# Altium PCB Elevator_Controller.PcbDoc
Units mil, origin at the board's own origin, x right, y up, seen from the top; angles counter-clockwise.
Board outline 6000 x 4000 mil, 2 copper layers (Top Layer, Bottom Layer); 37 components, 34 nets, 198 pads, 47 vias.
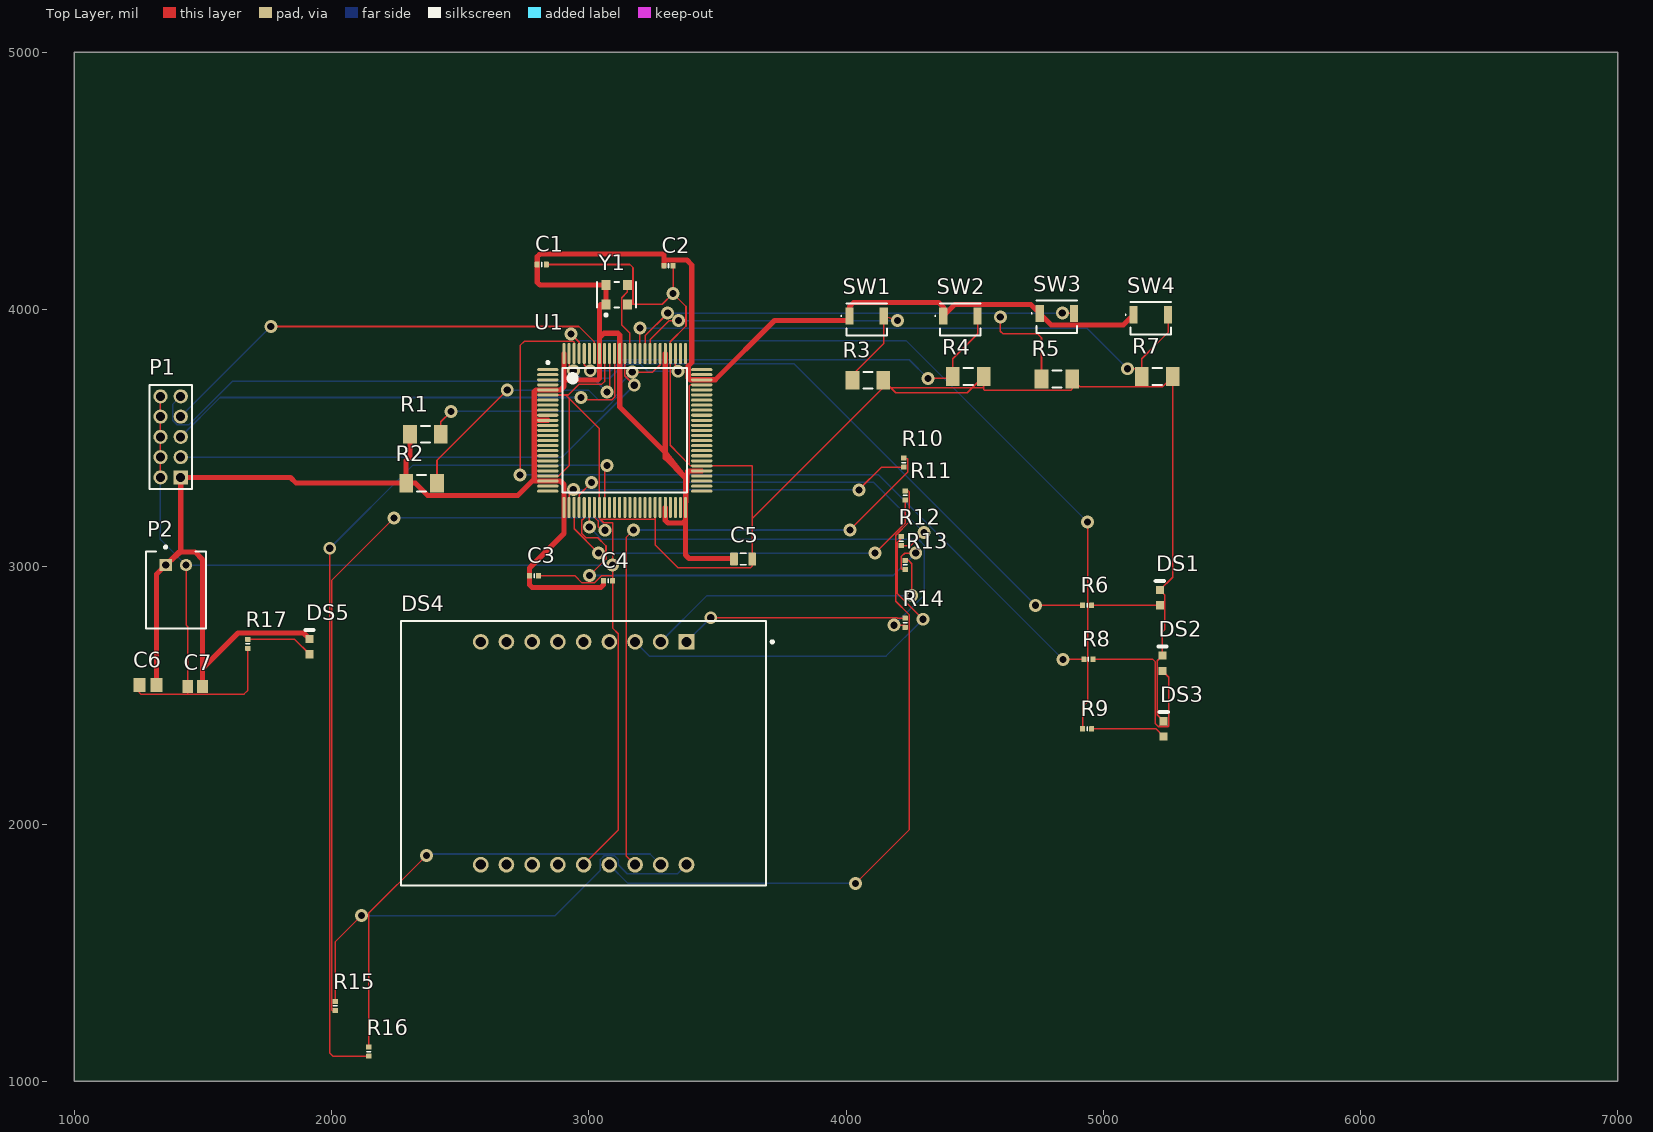
[diagram p0: Top Layer view]
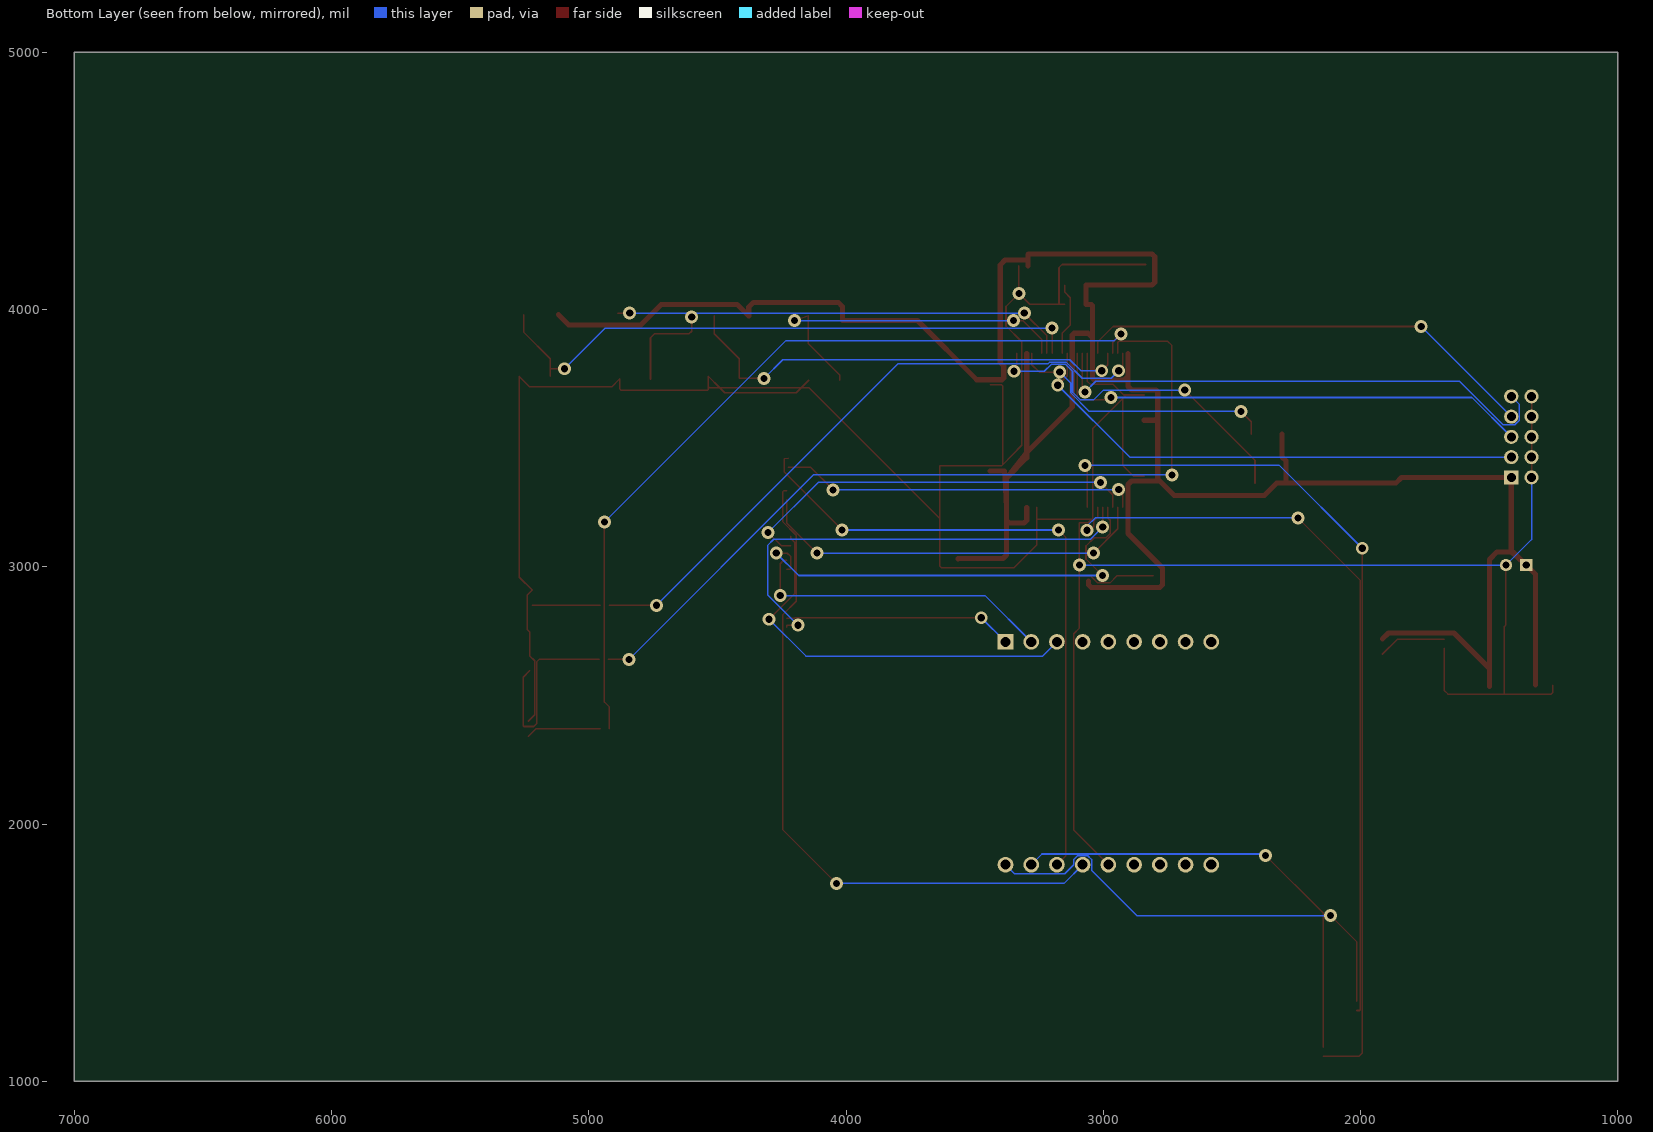
[diagram p1: Bottom Layer view, seen from below]
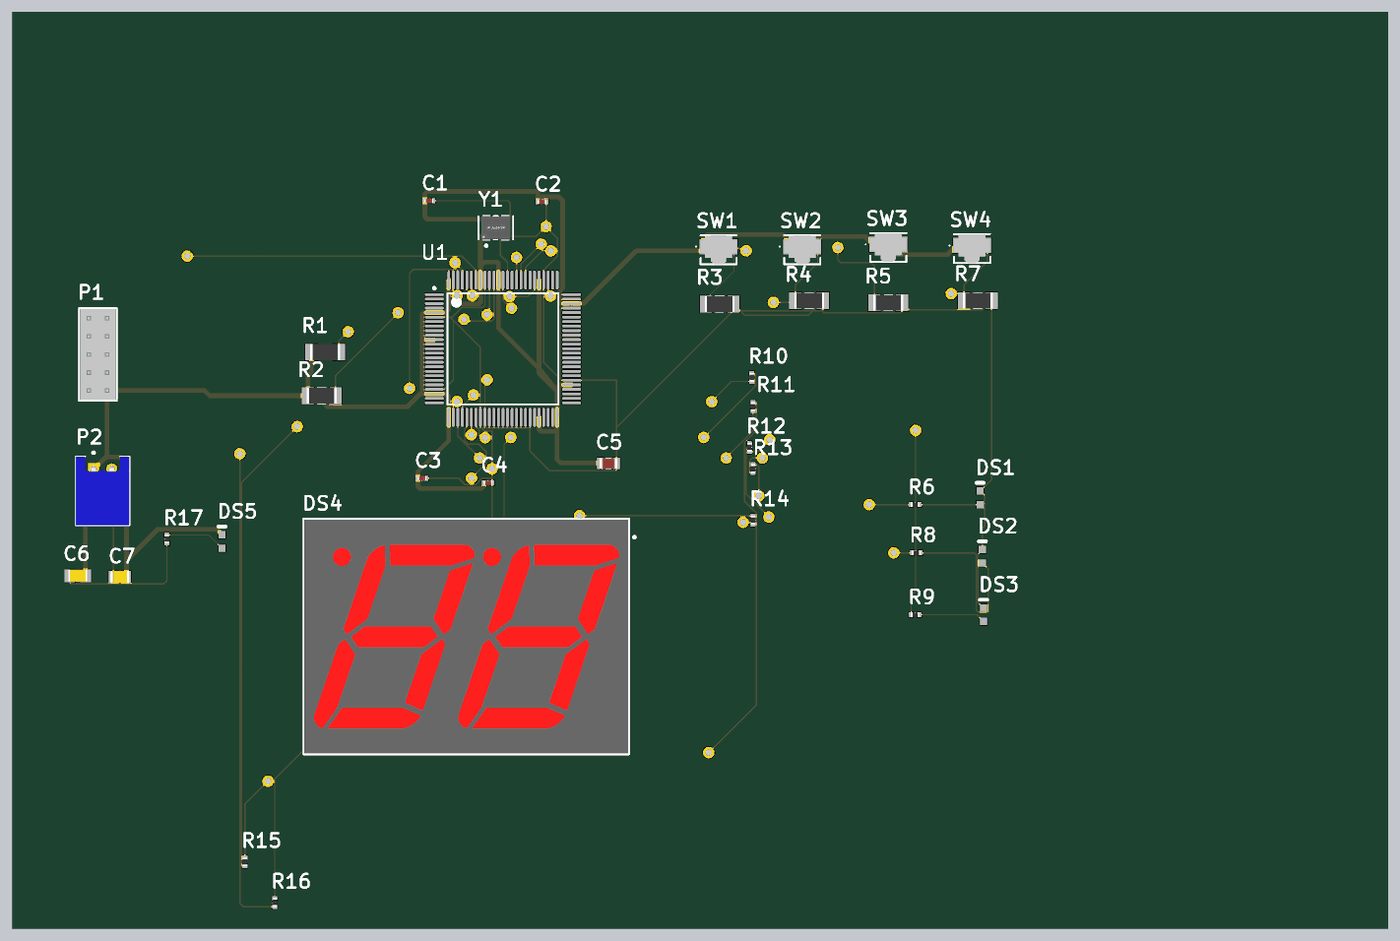
[diagram p2: 3D render of the assembled board from above, using the file's embedded part models]

## Layer stack, top to bottom
Top Solder: solder mask 0.4, Solder Resist, Dk 3.5
Top Layer: signal copper 1.4
Dielectric 1: dielectric 12.6, FR-4, Dk 4.8
Bottom Layer: signal copper 1.4
Bottom Solder: solder mask 0.4, Solder Resist, Dk 3.5

## Board outline
1000,1000 7000,1000 7000,5000 1000,5000

## Design rules (kind name [scope] priority, off if disabled: settings)
Clearance [All] p1: gap=1 ignorepadtopadclearanceinfootprint=FALSE
MinimumSolderMaskSliver [All] p1: minsoldermaskwidth=0.2
PolygonConnect [All] p1: connectstyle=Relief reliefconductorwidth=10 reliefentries=4 polygonreliefangle="90 Angle" airgapwidth=10
RoutingVias [All] p1: holewidth=28 width=50 viastyle="Through Hole" minholewidth=28 minwidth=50 maxholewidth=28 maxwidth=50
SilkToSilkClearance [All] p1: silktosilkclearance=3
SilkToSolderMaskClearance [IsPad] p1: minsilkscreentomaskgap=0.5 clearancetoexposedcopper=TRUE
SolderMaskExpansion [All] p1: expansion=4 istentingtop=FALSE
SupplyNets "Schematic Supply Nets_1" [InNet('+3v3')] p1: voltage=0.000
SupplyNets "Schematic Supply Nets" [InNet('GND')] p2: voltage=0.000
Width Power_Width [InNet('+3v3')] p1: maxlimit=25 minlimit=15 preferedwidth=20
Width [All] p2: maxlimit=8 minlimit=4 preferedwidth=6 minimp=50.000000 maximp=50.000000 favimp=50.000000
27 further rules are at their usual default settings.

## Classes and differential pairs
component class 04_Peripherals: DS1 DS2 DS3 DS4 R3 R4 R5 R6 R7 R8 R9 R10 R11 R12 R13 R14 R15 R16 SW1 SW2 SW3 SW4
component class 03_Config_Clock_JTAG: P1 R1 R2 Y1
component class 02_Power: C6 C7 DS5 P2 R17
component class 01_FPGA: C1 C2 C3 C4 C5 U1

## Components (designator, comment, footprint, x,y, rotation, side; value= is the part's Value field where it differs from the comment)
C1 "Capacitor 100nF +/-20% 50V 0402" CAPC0402(1005)60_L 2817.28,4175 r0 top value=100nF
C2 "Capacitor 100nF +/-20% 50V 0402" CAPC0402(1005)60_L 3310,4170 r0 top value=100nF
C3 "Capacitor 100nF +/-20% 50V 0402" CAPC0402(1005)60_L 2787.28,2965 r0 top value=100nF
C4 "Capacitor 100nF +/-20% 50V 0402" CAPC0402(1005)60_L 3075,2945 r0 top value=100nF
C5 "Capacitor 10µF +/-20% 25V 0805" CAPC0805(2012)145_L 3600,3030 r0 top value=10µF
C6 "Capacitor 10 uF +/- 10% 16 V 0805" CAPC2013X135X45NL10T25 1286.54,2540 r0 top value=10µF
C7 "Capacitor 100 nF +/-10% 50 V 0805" CAPC2013X95X50LL10T25 1470,2535 r0 top value=100nF
DS1 "HSMH-C190" AVAG-HSMX-C190_V 5220,2880 r90 top
DS2 "HSMH-C190" AVAG-HSMX-C190_V 5230,2625 r90 top
DS3 "HSMH-C190" AVAG-HSMX-C190_V 5235,2370 r90 top
DS4 "DC08-11SRWA" FP-DC08-11SRWA-MFG 2980,2275 r180 top
DS5 "HSMH-C190" AVAG-HSMX-C190_V 1915,2689.52 r90 top
P1 "TW-05-03-F-D-378-078" SMTC-TW-05-03-X-D-378-078 1413.74,3347.52 r90 top
P2 "S2B-PH-K-S(LF)(SN)" JST-S2B-PH-K-S_V 1395,2910 r0 top
R1 "Resistor 10k +/-1% 1206 250 mW" RESC3216X60X45ML15T20 2365,3515 r0 top value=10k
R2 "Resistor 10k +/-1% 1206 250 mW" RESC3216X60X45ML15T20 2350,3325 r0 top value=10k
R3 "Resistor 10k +/-1% 1206 250 mW" RESC3216X60X45ML15T20 4085,3725 r0 top value=10k
R4 "Resistor 10k +/-1% 1206 250 mW" RESC3216X60X45ML15T20 4475,3740 r0 top value=10k
R5 "Resistor 10k +/-1% 1206 250 mW" RESC3216X60X45ML15T20 4820,3730 r0 top value=10k
R6 "Resistor 330R +/-5 % 0402 63 mW" RESC0402(1005)_L 4937.28,2850 r0 top value=330
R7 "Resistor 10k +/-1% 1206 250 mW" RESC3216X60X45ML15T20 5210,3740 r0 top value=10k
R8 "Resistor 330R +/-5 % 0402 63 mW" RESC0402(1005)_L 4942.28,2640 r0 top value=330
R9 "Resistor 330R +/-5 % 0402 63 mW" RESC0402(1005)_L 4937.28,2370 r0 top value=330
R10 "330R2J" RESC0402(1005)_L 4225,3405 r90 top value=330
R11 "330R2J" RESC0402(1005)_L 4230,3277.28 r90 top value=330
R12 "330R2J" RESC0402(1005)_L 4215,3100 r90 top value=330
R13 "330R2J" RESC0402(1005)_L 4230,3007.28 r90 top value=330
R14 "330R2J" RESC0402(1005)_L 4230,2782.28 r90 top value=330
R15 "330R2J" RESC0402(1005)_L 2015,1292.72 r90 top value=330
R16 "330R2J" RESC0402(1005)_L 2145,1115 r90 top value=330
R17 "1KR2J" RESC0402(1005)_L 1675,2700 r90 top value=1k
SW1 "B3U-3000P" OMRON-B3U-3000P_V 4080,3975 r0 top
SW2 "B3U-3000P" OMRON-B3U-3000P_V 4445,3975 r0 top
SW3 "B3U-3000P" OMRON-B3U-3000P_V 4820,3985 r0 top
SW4 "B3U-3000P" OMRON-B3U-3000P_V 5185,3980 r0 top
U1 "LCMXO2-640HC-4TG100C" TQFP100_M 3140,3530 r0 top
Y1 "ASEM1-100.000MHZ-LC-T" FP-ASEM-MFG 3108.66,4057.6 r0 top

## Footprints (in the part's own frame and the unit in brackets; to place one, negate y for a bottom-side part, rotate by r counter-clockwise, add the part's x,y. Pads: shape width x height; smd on the part's side, far side on the other; paste and mask are expansions set on the pad)
AVAG-HSMX-C190_V [mm] "SMD, 2-Leads, Body 1.6x0.8mm, Height 0.9mm"
  rect 0.8x0.8 smd: 1(-0.75,0) 2(0.75,0)
  silkscreen extent 1.65,-0.4 1.65,0.4, body extent -0.8,-0.4 0.8,0.4, height 0.9
CAPC0402(1005)60_L [mm] "Chip Capacitor, Body 1.0x0.5mm, Height 0.6mm, IPC High Density"
  rrect25% 0.5x0.55 smd: 1(-0.45,0) 2(0.45,0)
  silkscreen extent 0,-0.2 0,0.2, body extent -0.5,-0.25 0.5,0.25, height 0.6
CAPC0805(2012)145_L [mm] "Chip Capacitor, Body 2.0x1.2mm, Height 1.45mm, IPC High Density"
  rrect25% 0.76x1.3 smd: 1(-0.9,0) 2(0.89,0)
  silkscreen extent -0.3,-0.55 0.3,0.55, body extent -1,-0.6 1,0.6, height 1.45
CAPC2013X95X50LL10T25 [mm] "Chip Capacitor, 2-Leads, Body 2.10x1.35mm, IPC High Density"
  rect 1.05x1.3 smd: 1(-0.725,0) 2(0.725,0)
  body extent -1.05,-0.67 1.05,0.67, height 0.95
CAPC2013X135X45NL10T25 [mm] "Chip Capacitor, 2-Leads, Body 2.10x1.35mm, IPC Medium Density"
  rect 1.2x1.4 smd: 1(-0.85,0) 2(0.85,0)
  body extent -1.05,-0.67 1.05,0.67, height 1.35
FP-ASEM-MFG [mm]
  rect 0.9x1 smd paste+0 mask+0: 1(-1.05,-0.95) 2(1.05,-0.95) 3(1.05,0.95) 4(-1.05,0.95)
  silkscreen extent -1.92,-2.12 1.92,1.28, body extent -1.73,-1.55 1.73,1.55, height 0.25
FP-DC08-11SRWA-MFG [mm]
  rect 1.55x1.55 hole 1 paste-2539.97 mask+0: 1(-10.16,-11)
  round 1.55 hole 1 paste-2539.97 mask+0: 2(-7.62,-11) 3(-5.08,-11) 4(-2.54,-11) 5(0,-11) 6(2.54,-11) 7(5.08,-11) 8(7.62,-11) 9(10.16,-11) 10(10.16,11) 11(7.62,11) 12(5.08,11) 13(2.54,11) 14(0,11) 15(-2.54,11) 16(-5.08,11) 17(-7.62,11) 18(-10.16,11)
  silkscreen extent -18.75,-13.05 18.03,13.05, body extent -18.13,-13.15 18.13,13.15, height 0.25
JST-S2B-PH-K-S_V [mm] "THD, 2-Leads, Body 7.6x5.9mm, Pitch 2mm"
  rect 1.2x1.2 hole 0.7: 1(-1,2.45)
  round 1.2 hole 0.7: 2(1,2.45)
  silkscreen extent -2.95,-3.8 2.95,4.35, body extent -2.95,-3.8 2.95,3.8, height 4.8
OMRON-B3U-3000P_V [mm] "SMD, 2-Leads, Body 4x3.2mm"
  rect 0.8x1.7 smd: 1(-1.7,0) 2(1.7,0)
  silkscreen extent -2.55,-1.95 2,1.25, body extent -2,-1.95 2,1.25, height 1.2
RESC0402(1005)_L [mm] "Chip Resistor, Body 1.0x0.5mm, IPC High Density"
  rrect25% 0.5x0.55 smd: 1(-0.45,0) 2(0.45,0)
  silkscreen extent 0,-0.2 0,0.2, body extent -0.5,-0.25 0.5,0.25, height 0.3
RESC3216X60X45ML15T20 [mm] "Chip Resistor, 2-Leads, Body 3.3x1.75mm, IPC Low Density"
  rect 1.35x1.85 smd: 1(-1.525,0) 2(1.525,0)
  silkscreen extent -0.45,-0.82 0.45,0.82, body extent -1.65,-0.87 1.65,0.87, height 0.6
SMTC-TW-05-03-X-D-378-078 [mm] "Terminal Strip, 2x5 Pins, Vertical, 2mm Pitch, Male"
  rect 1.4x1.4 hole 0.89: 1(0,0)
  round 1.4 hole 0.89: 2(0,2) 3(2,0) 4(2,2) 5(4,0) 6(4,2) 7(6,0) 8(6,2) 9(8,0) 10(8,2)
  silkscreen extent -1.13,-1.1 9.13,3.1, body extent -1,-0.97 9,2.97, height 11.6
TQFP100_M [mm] "Thin QFP, 100-Leads, Body 14x14mm, Pitch 0.5mm, IPC Low Density"
  oval 2.1x0.3 smd: 1(-7.6,6) 2(-7.6,5.5) 3(-7.6,5) 4(-7.6,4.5) 5(-7.6,4) 6(-7.6,3.5) 7(-7.6,3) 8(-7.6,2.5) 9(-7.6,2) 10(-7.6,1.5) 11(-7.6,1) 12(-7.6,0.5) 13(-7.6,0) 14(-7.6,-0.5) 15(-7.6,-1) 16(-7.6,-1.5) 17(-7.6,-2) 18(-7.6,-2.5) 19(-7.6,-3) 20(-7.6,-3.5) 21(-7.6,-4) 22(-7.6,-4.5) 23(-7.6,-5) 24(-7.6,-5.5) 25(-7.6,-6) 51(7.6,-6) 52(7.6,-5.5) 53(7.6,-5) 54(7.6,-4.5) 55(7.6,-4) 56(7.6,-3.5) 57(7.6,-3) 58(7.6,-2.5) 59(7.6,-2) 60(7.6,-1.5) 61(7.6,-1) 62(7.6,-0.5) 63(7.6,0) 64(7.6,0.5) 65(7.6,1) 66(7.6,1.5) 67(7.6,2) 68(7.6,2.5) 69(7.6,3) 70(7.6,3.5) 71(7.6,4) 72(7.6,4.5) 73(7.6,5) 74(7.6,5.5) 75(7.6,6)
  oval 0.3x2.1 smd: 26(-6,-7.6) 27(-5.5,-7.6) 28(-5,-7.6) 29(-4.5,-7.6) 30(-4,-7.6) 31(-3.5,-7.6) 32(-3,-7.6) 33(-2.5,-7.6) 34(-2,-7.6) 35(-1.5,-7.6) 36(-1,-7.6) 37(-0.5,-7.6) 38(0,-7.6) 39(0.5,-7.6) 40(1,-7.6) 41(1.5,-7.6) 42(2,-7.6) 43(2.5,-7.6) 44(3,-7.6) 45(3.5,-7.6) 46(4,-7.6) 47(4.5,-7.6) 48(5,-7.6) 49(5.5,-7.6) 50(6,-7.6) 76(6,7.6) 77(5.5,7.6) 78(5,7.6) 79(4.5,7.6) 80(4,7.6) 81(3.5,7.6) 82(3,7.6) 83(2.5,7.6) 84(2,7.6) 85(1.5,7.6) 86(1,7.6) 87(0.5,7.6) 88(0,7.6) 89(-0.5,7.6) 90(-1,7.6) 91(-1.5,7.6) 92(-2,7.6) 93(-2.5,7.6) 94(-3,7.6) 95(-3.5,7.6) 96(-4,7.6) 97(-4.5,7.6) 98(-5,7.6) 99(-5.5,7.6) 100(-6,7.6)
  silkscreen extent -7.72,-6.15 6.15,6.82, body extent -7,-7 7,7, height 1.6

## Part data
C1 C2 C3 C4: library part CMP-001-00067-3, "Chip Capacitor, 100nF +/-20%, 50V, 0402, Thickness 0.6 mm", Case/Package=0402, Max Operating Temperature=85°C, Min Operating Temperature=-55°C, Tolerance=10%, Voltage Rating=50V, Mounting Technology=SMT, Pins=2
C5: library part CMP-001-00079-4, "Chip Capacitor, 10µF +/-20%, 25V, 0805, Thickness 1.45 mm", Case/Package=0805, Max Operating Temperature=85°C, Min Operating Temperature=-55°C, Tolerance=10%, Voltage Rating=25V, Mounting Technology=SMT, Pins=2
C6: library part CMP-001-00015-6, "Chip Capacitor, 10 uF, +/- 10%, 16 V, 0805 (2012 Metric)", Capacitor Type=Ceramic, Case/Package=0805, Max Operating Temperature=85°C, Min Operating Temperature=-55°C, Tolerance=10%, Voltage Rating=16V, Mounting Technology=SM, Pins=2, RoHS Compliant=True
C7: library part CMP-001-00018-6, "Chip Capacitor, 100 nF, +/- 10%, 50 V, 0805 (2012 Metric)", Capacitor Type=Ceramic, Case/Package=0805, Max Operating Temperature=125°C, Min Operating Temperature=-55°C, Tolerance=10%, Voltage Rating=50V, Mounting Technology=SM, Pins=2, RoHS Compliant=True
DS1 DS2 DS3 DS5: library part CMP-007-00014-2, "LED Uni-Color Red, 65 mW, 20 mA, -40 to 85 degC, 2-Pin SMD, RoHS, Tape and Reel", Case/Package=0603, Colour=Red, Forward Current=20mA, Forward Voltage=1.8V, Manufacturer=Avago, Max Operating Temperature=85°C, Min Operating Temperature=-40°C, Package Description="2-Pin Surface Mount Device, Body 1.6 x 0.8 mm, Height 0.9 mm", Package Quantity=4000, Package Reference=HSMX-C190, Power=78mW, Datasheet URL=http://docs.avagotech.com/docs/AV02-0551EN, Datasheet Version=Mar-12, Illumination Colour=Red, Lens Style=Diffused, Luminous Intensity=17mcd, Manufacturer URL=http://www.avagotech.com/, Mounting Technology=SM, Nominal Vf=1.8V, Packaging=TapeandReel, Pins=2, RoHS Compliant=True, Viewing Angle=170degrees
DS4: library part CMP-44525-000001-1, "DISPLAY 660NM RED 2DIG 0.8\" 7SEG", Forward Current=20mA, Forward Voltage=1.85V, Manufacturer=Kingbright, Power Dissipation=75mW, Reverse Voltage=5V, Temperature="-40°C to +85°C", Temperature Range High=+85°C, Temperature Range Low=-40°C, Automotive=No, Category=Disp, ComponentLink2Description=Datasheet, ComponentLink2URL=https://www.kingbrightusa.com/images/catalog/SPEC/DC08-11SRWA.pdf, Device Class L1=Optoelectronics, Device Class L2=Displays, Device Class L3="LED Displays", Digikey Description="DISPLAY 660NM RED 2DIG 0.8\" 7SEG", Display Type=LED, Element Config="Common Cathode", Height=10.25mm, Lead Free=Yes, Luminous Intensity=32mcd, Manufacturer Part Number=DC08-11SRWA, Mouser Description="LED Displays & Accessories Dual Red 640nm Common Cathode", Octopart=https://octopart.com/dc08-11srwa-kingbright-55457135, Package=DC08-11SRWA, RoHS=TRUE, Test Current=20mA, Wavelength=640nm
P1: library part CMP-1029-00381-1, "Through-Hole Board Stacker, Vertical, -55 to 125 degC, 2 mm Pitch, 10-Pin, Male, RoHS", Manufacturer=Samtec, Temperature Range="-55 to 125 degC", ComponentLink1Description="Manufacturer URL", ComponentLink1URL=http://www.samtec.com, ComponentLink2Description=Datasheet, ComponentLink2URL=http://d2a072wq521u33.cloudfront.net/catalog_english//TW_TH.PDF, ComponentLink3Description="Package Specification", ComponentLink3URL=http://www.samtec.com/documents/webfiles/cpdf/TW-XX-XX-X-X-XXX-XXX-XXX-XX-MKT2.pdf, DatasheetVersion=F-214, Mounting Technology=Through-hole, Orientation=Vertical, PackageDescription="High Temp 2mm Terminal Strip(Board Stacking)", PackageReference=TW-05-03-X-D-378-078, PackageVersion="BF, 6/1998", PartNumber=TW-05-03-F-D-378-078, Pitch="2 mm", RoHS=True
P2: library part CMP-002-00030-2, "Male Header, Pitch 2 mm, 1 x 2 Position, Height 4.8 mm, Tail Length 3.4 mm, -25 to 85 degC, RoHS, Bulk", Case/Package=S2B-PH-K-S, Manufacturer="Japan Solderless Terminals", Max Operating Temperature=85°C, Min Operating Temperature=-25°C, Package Description="Male Header, Pitch 2 mm, 1 x 2 Position, Height 4.8 mm, Tail Length 3.4 mm", Connector Type=Header, Datasheet URL=http://www.jst-mfg.com/product/pdf/eng/ePH.pdf, Datasheet Version=Dec-12, Gender=Male, Mounting Technology=SM, Package Reference=S2B-PH-K-S, RoHS Compliant=Unknown
R1 R2 R3 R4 R5 R7: library part CMP-009-00016-5, "Chip Resistor, 10 KOhm, +/- 1%, 0.25 W, -55 to 155 degC, 1206 (3216 Metric)", Case/Package=1206, Max Operating Temperature=155°C, Min Operating Temperature=-55°C, Power=250mW, Tolerance=1%, Voltage Rating=200V, Mounting Technology=SM, Pins=2, RoHS Compliant=True
R6 R8 R9: library part CMP-009-00132-3, "Chip Resistor, 330 Ohms, +/-5 %, 63 mW, -55 to 155 degC, 0402", Case/Package=0402, Max Operating Temperature=155°C, Min Operating Temperature=-55°C, Power=63mW, Tolerance=5%, Pins=2
R10 R11 R12 R13 R14 R15 R16: library part CMP-009-00095-2, "330R 0.063W 5% 0402 (1005 Metric)  SMD", Case/Package=0402, Power=63mW, Tolerance=5%, Mounting Technology=SMT, Pins=2
R17: library part CMP-009-00075-2, "1K 0.063W 5% 0402 (1005 Metric)  SMD", Case/Package=0402, Power=63mW, Tolerance=5%, Mounting Technology=SMT, Pins=2
SW1 SW2 SW3 SW4: library part CMP-011-00005-2, "Tactile Switch, SPST-NO, 0.05 A, 12 V, -25 to 70 degC, 2-Pin SMD, RoHS, Tape and Reel", Contact Current Rating=50mA, IP Rating=IP40, Manufacturer="Omron Electronic Components", Max Contact Resistance=100mohm, Max Operating Temperature=70°C, Max Voltage Rating (DC)=12V, Min Operating Temperature=-25°C, Operating Force=162gf, Package Description="2-Pin Surface Mount Device, Body 4 x 3.2 mm", Package Quantity=4000, Case/Package=B3U-3000P, Contact Material=Silver, Current Rating=50mA, Datasheet URL=https://www.omron.com/ecb/products/pdf/en-b3u.pdf, Datasheet Version=Jan-15, Manufacturer URL=http://www.omron.com/, Max Current Rating=50mA, Mounting Technology=SM, Package Reference=B3U-3000P, Packaging=TapeandReel, RoHS Compliant=True, Throw Configuration=SPST, Voltage Rating=12V, Voltage Rating (DC)=12V
U1: library part CMP-0111-00271-1, "MachXO2 High Performance CPLD with 640 LUTs, Voltage Regulator, 2.5V/3.3V, 100-pin TQFP, Speed Grade-4, Commercial Grade, Halogen Free (RoHS)", Code_JEDEC=MS-026-BED, DatasheetVersion="ver01.0, Nov-2010", PackageDescription="100-Pin Thin Quad Flat Pack (TQFP100)", PackageReference=TQFP100, PackageVersion="ver02.6, Nov-2010"
Y1: library part CMP-27762-005945-1, "MEMS OSC XO 100.0000MHZ CMOS SMD", Case/Package=SMD/SMT, Frequency=100MHz, Frequency Stability=50ppm, Load Capacitance=15pF, Max Operating Temperature=85°C, Max Supply Current=10mA, Max Supply Voltage=3.6V, Min Operating Temperature=-40°C, Min Supply Voltage=3V, Operating Supply Voltage=3.3V, Height=0.035inch, Lead Free="Lead Free", Length=0.126inch, Mount="Surface Mount", Number of Pins=4, Packaging="Tape and Reel", Radiation Hardening=No, Series="Pure Silicon™ ASEM", Width=0.098inch

## Via types
v1: diameter 50, hole 28, Top Layer to Bottom Layer, 47 vias

## Nets (pads, with @x,y where several pads share a name; then routed paths per layer and width w, separated by ;. In a path a pad name is that pad's centre, name@x,y a point inside that pad or via, vN(x,y) a via of type N, cw(c..) or ccw(c..) an arc to the next point about the centre after c; other vN are vias at no path point)
+3v3: C1.1 C2.1 C3.1 C4.1 C5.1 C6.2 C7.2 DS5.2 P1.1 P2.1 R1.1 R2.1 SW1.1 SW2.1 SW3.1 SW4.1 U1.5 U1.11 U1.23 U1.26 U1.46 U1.50 U1.55 U1.73 U1.80 U1.89 U1.93 U1.100 Y1.1 Y1.4 | length 11263
  Top Layer w20: C6.2 1320,2970.83 P2.1 ; C7.2 1498.54,2605 ; DS5.2 1891.06,2743 1636.54,2743 1498.54,2605 ; R1.1 2304.96,3427 2289.96,3412 R2.1 ; U1.11 2798.63,3569.37 2788,3580 ; U1.100 2903.78,3740 ; C4.1 3057.28,2930 3047.28,2920 2779.57,2920 2769.57,2930 C3.1 2769.57,2995 2903.78,3129.21 U1.26 2903.78,3320 2890.63,3333.15 U1.23 2788,3333.15 ; C2.1 3292.28,4185 ; U1.46 3297.48,3180 3307.48,3170 3366.22,3170 3376.22,3180 ; U1.80 3297.48,3443.74 ; U1.55 3383.74,3372.52 3382.25,3344.46 U1.50 ; C5.1 3564.57,3032 3390,3032 3376.22,3045.78 3376.22,3170 3376.22,3180 ; SW4.1 5078.07,3940 4798.07,3940 SW3.1 4718.07,4020 4423.07,4020 SW2.1 4378.07,4010 4360.07,4028 4030,4028 4013.07,4011.07 SW1.1 4013.07,3957 3722.15,3957 3492,3726.85 U1.73 3394.15,3726.85 3386.87,3734.13 3386.87,3780 3400.34,3793.47 3400.34,4173.66 3382,4192 3299.28,4192 3292.28,4185 ; P2.1 1407.17,3058 1413.74,3058 ; P2.1 1413.74,3058 ; 1413.74,3058 1469,3058 1498.54,3028.46 1498.54,2605 ; 1413.74,3058 P1.1 1840,3347.52 1862.52,3325 R2.1 ; R2.1 2326,3325 2374,3277 2723.85,3277 2780,3333.15 2788,3333.15 ; 2788,3333.15 2788,3580 ; 2788,3580 2788,3680.48 2795,3687.48 U1.5 2890,3687.48 2903.78,3701.26 2903.78,3740 ; 2903.78,3740 2917.91,3725.87 3035.24,3725.87 3042,3732.63 3042,3797.57 3041.57,3798 U1.93 3041.57,3890 ; 3041.57,3890 3041.57,4015 3046.77,4020.2 Y1.1 Y1.4 2810,4095 2799.57,4105.43 C1.1 2799.57,4205.14 2810,4215.57 3290.43,4215.57 3292.28,4213.72 3292.28,4185 ; 3041.57,3890 3059.15,3907.57 3113.43,3907.57 3120.32,3900.68 U1.89 3120.32,3620.9 3297.48,3443.74 ; 3297.48,3443.74 3376.22,3344.78 ; 3297.48,3443.74 3297.48,3423.52 3376.22,3344.78 ; 3376.22,3180 U1.50 ; U1.50 3376.22,3344.78
GND: C1.2 C2.2 C3.2 C4.2 C5.2 C6.1 C7.1 DS1.2 DS2.2 DS3.2 DS4.14 P1.2 P1.4 P1.6 P1.8 P1.10 P2.2 R3.2 R4.2 R5.2 R7.2 R17.1 U1.6 U1.22 U1.33 U1.44 U1.56 U1.72 U1.79 U1.92 Y1.2 | length 13586.5
  Top Layer w6: C6.1 1253.07,2510 1258.07,2505 1441.46,2505 ; P1.2 P1.4 P1.6 P1.8 P1.10 ; P2.2 1434.37,2774.09 1441.46,2767 C7.1 1441.46,2505 ; R17.1 1675,2520 1660,2505 1441.46,2505 ; C3.2 2946,2965 2974,2937 3021,2937 3049,2965 3092.72,2965 ; C1.2 3160,4175 3172,4163 3172,4020.2 ; U1.22 2883,3352.83 2924,3393.83 2924,3653.8 ; U1.6 2910,3667.8 ; DS4.14 3115,1976.93 3115,2740 3092.72,2762.28 C4.2 3092.72,2965 ; U1.92 3061.26,3720 3051.26,3710 2962.69,3710 2920.48,3667.8 2910,3667.8 ; Y1.2 3172,4020.2 ; U1.44 3258.11,3187.5 ; C2.2 v1(3327.72,4062.28) ; U1.72 3395,3707.17 3390,3702.17 3390,3397.2 ; R3.2 4174.04,3696 ; DS3.2 5210,2424.53 5210,2634.53 DS2.2 5230,2747 5240,2757 5240,2889.53 DS1.2 5270.04,2959.57 R7.2 5229.04,3699 4911.04,3699 R5.2 4880.04,3692.08 4875,3687.04 4538,3687.04 4535.04,3690 4535.04,3701.04 ; 2910,3667.8 2924,3653.8 ; 2924,3653.8 3041.57,3536.22 U1.33 3041.57,3187.9 3044.48,3185 ; 3044.48,3185 3255.61,3185 3258.11,3187.5 ; 3044.48,3185 3058.44,3171.03 3092,3171.03 3092.72,3170.32 v1(3092.72,3006.46) 3092.72,2965 ; 3172,4020.2 3285.63,4020.2 v1(3327.72,4062.28) ; 3258.11,3187.5 3258.11,3084.89 3345.96,2997.04 3630,2997.04 3635.04,3002.08 C5.2 3635.04,3187.04 ; v1(3327.72,4062.28) 3378,4012 3378,3935.83 3317.17,3875 U1.79 3317.17,3472.04 3390,3397.2 ; 3390,3397.2 3395,3392.2 U1.56 3635.04,3392.16 3635.04,3187.04 ; 3635.04,3187.04 4144,3696 4174.04,3696 ; 4174.04,3696 4193.52,3676.52 4471.56,3676.52 4491.04,3696 ; 4174.04,3696 4491.04,3696 ; 4491.04,3696 4530,3696 4535.04,3701.04 ; 4491.04,3696 R4.2 4535.04,3701.04
  Bottom Layer w6: P1.2 1335,3105.83 P2.2 v1(3092.72,3006.46)
NetDS1_1: DS1.1 R6.2 | length 265.2
  Top Layer w6: R6.2 5087,2850 5087.48,2850.48 DS1.1
NetDS2_1: DS2.1 R8.2 | length 769.1
  Top Layer w6: R8.2 5193,2640 5203,2630 5203,2390 5214,2379 5252.5,2379 5255,2381.5 5255,2570.47 DS2.1
NetDS3_1: DS3.1 R9.2 | length 292.2
  Top Layer w6: R9.2 5205.47,2370 DS3.1
NetDS4_1: DS4.1 R14.2 | length 889.8
  Top Layer w6: v1(3473.97,2802.04) 4198,2802.04 4200.04,2800 R14.2
  Bottom Layer w6: DS4.1 v1(3473.97,2802.04)
NetDS4_2: DS4.2 R13.2 | length 1204.8
  Top Layer w6: R13.2 4242.5,3025 4255.39,3012.11 v1(4255.39,2888)
  Bottom Layer w6: DS4.2 3459.93,2888 v1(4255.39,2888)
NetDS4_3: DS4.3 R12.2 | length 1570
  Top Layer w6: R12.2 4215,3110.72 4200,3095.72 4200,2895 v1(4299,2796)
  Bottom Layer w6: DS4.3 3235.07,2653 4156,2653 v1(4299,2796)
NetDS4_15: DS4.15 R11.2 | length 2656
  Top Layer w6: v1(4037,1769) 4245,1977 4245,2814 4193,2866 4193,3122.5 4245,3174.5 4245,3292.5 4242.5,3295 R11.2
  Bottom Layer w6: DS4.15 3152.93,1769 v1(4037,1769)
NetDS4_16: DS4.16 R10.2 | length 2554.2
  Top Layer w6: v1(3174,3143) 3145,3114 3145,1876.93 DS4.16 ; v1(4015,3143) 4240,3368 4240,3420.22 R10.2
  Bottom Layer w6: v1(3174,3143) v1(4015,3143)
NetDS4_17: DS4.17 R16.2 | length 1768.5
  Top Layer w6: R16.2 2145,1654 v1(2369,1878)
  Bottom Layer w6: v1(2369,1878) 2374.44,1883.44 3238.49,1883.44 DS4.17
NetDS4_18: DS4.18 R15.2 | length 1815.2
  Top Layer w6: R15.2 2015,1543 v1(2116,1644)
  Bottom Layer w6: v1(2116,1644) 2869.49,1644 3045.49,1820 3045.49,1861.93 3060,1876.44 3100,1876.44 3114.51,1861.93 3114.51,1842 3149.51,1807 3345.07,1807 DS4.18
NetDS5_1: DS5.1 R17.2 | length 263.9
  Top Layer w6: R17.2 1857.28,2717.72 DS5.1
NetP1_3: P1.3 U1.88 | length 2017.7
  Top Layer w6: U1.88 3140,3743 v1(3177,3706)
  Bottom Layer w6: P1.3 2897.26,3426.26 v1(3177,3706)
NetP1_5: P1.5 U1.90 | length 1927.3
  Top Layer w6: v1(2970,3658) 2978.43,3649.57 3090.2,3649.57 3100.63,3660 U1.90
  Bottom Layer w6: P1.5 1566.74,3658 v1(2970,3658)
NetP1_7: P1.7 U1.94 | length 1822.9
  Top Layer w6: v1(1764,3934) 2961.89,3934 3021.89,3874 U1.94
  Bottom Layer w6: P1.7 v1(1764,3934)
NetP1_9: P1.9 U1.91 | length 2043.8
  Top Layer w6: v1(3071,3679) 3080.94,3688.94 U1.91
  Bottom Layer w6: P1.9 1382,3630.74 1382,3570 1400,3552 1446,3552 1615,3721 3029,3721 v1(3071,3679)
NetR1_2: R1.2 U1.81 | length 1059.3
  Top Layer w6: R1.2 2425.04,3564 v1(2465,3603.96) ; v1(3169,3757) 3249,3757 3277.8,3785.8 U1.81
  Bottom Layer w6: v1(2465,3603.96) 3053.96,3603.96 3127,3677 3127,3715 v1(3169,3757)
NetR2_2: R2.2 U1.78 | length 1343.6
  Top Layer w6: R2.2 2410.04,3414 v1(2683.04,3687) ; U1.78 3336.85,3770.15 v1(3347,3760)
  Bottom Layer w6: v1(2683.04,3687) 2999,3687 3036,3650 3090,3650 3119.45,3679.45 3119.45,3760.45 3146.5,3787.5 3201.5,3787.5 3229,3760 v1(3347,3760)
NetR3_1: R3.1 SW1.2 U1.83 | length 1402.3
  Top Layer w6: U1.83 3238.43,3882.53 3312.9,3957 v1(3349,3957) ; R3.1 4024.96,3746.03 4146.93,3868 SW1.2 v1(4200,3957)
  Bottom Layer w6: v1(3349,3957) v1(4200,3957)
NetR4_1: R4.1 SW2.2 U1.96 | length 1817.1
  Top Layer w6: U1.96 2982.52,3785.48 v1(3006,3762) ; v1(4319,3732) 4414.96,3732 R4.1 4414.96,3809 4511.93,3905.97 SW2.2
  Bottom Layer w6: v1(3006,3762) 3086.81,3762 3129.81,3805 4246,3805 v1(4319,3732)
NetR5_1: R5.1 SW3.2 U1.84 | length 2181.4
  Top Layer w6: U1.84 3218.74,3898 v1(3306.74,3986) ; v1(4600,3971) 4600,3916 4610,3906 4743.96,3906 4759.96,3890 R5.1 ; v1(4841,3986) 4886.93,3986 SW3.2
  Bottom Layer w6: v1(3306.74,3986) v1@4615,3986 ; v1(4600,3971) v1@4615,3986 ; v1(4841,3986) v1@4615,3986
NetR6_1: R6.1 U1.99 | length 2482.3
  Top Layer w6: U1.99 2923.46,3778.54 v1(2940,3762) ; v1(4737,2850) R6.1
  Bottom Layer w6: v1(2940,3762) 2969,3733 3081.5,3733 3143,3794.5 3208.91,3794.5 3214.41,3789 3798,3789 v1(4737,2850)
NetR7_1: R7.1 SW4.2 U1.85 | length 2397.4
  Top Layer w6: U1.85 v1(3199.06,3928) ; v1(5094,3770) R7.1@5149.96,3770 ; R7.1 R7.1@5149.96,3770 ; SW4.2 5251.93,3910.97 5149.96,3809 R7.1@5149.96,3770
  Bottom Layer w6: v1(3199.06,3928) 4936,3928 v1(5094,3770)
NetR8_1: R8.1 U1.98 | length 3253.2
  Top Layer w6: v1(2733,3357.05) 2733,3860 2749,3876 2940,3876 2943.15,3872.85 U1.98 ; v1(4844,2640) R8.1
  Bottom Layer w6: v1(2733,3357.05) 4126.95,3357.05 v1(4844,2640)
NetR9_1: R9.1 U1.97 | length 3211.8
  Top Layer w6: v1(2931,3905) 2962.83,3873.17 U1.97 ; R9.1 4919.57,2454.57 4939,2474 v1(4939,3174)
  Bottom Layer w6: v1(2931,3905) 2958,3878 4235,3878 v1(4939,3174)
NetR10_1: R10.1 U1.27 | length 1398
  Top Layer w6: U1.27 2923.46,3283.46 v1(2940,3300) ; v1(4050,3299) 4138.28,3387.28 R10.1
  Bottom Layer w6: v1(2940,3300) 2941,3299 v1(4050,3299)
NetR11_1: R11.1 U1.28 | length 1547.1
  Top Layer w6: U1.28 2943.15,3147.85 v1(3038,3053) ; v1(4113,3053) 4230,3170 R11.1
  Bottom Layer w6: v1(3038,3053) v1(4113,3053)
NetR12_1: R12.1 U1.29 | length 1599.5
  Top Layer w6: U1.29 2962.83,3279.83 v1(3011,3328) ; R12.1 4252,3082.28 v1(4302.86,3133.14)
  Bottom Layer w6: v1(3011,3328) 3012,3329 4107,3329 v1(4302.86,3133.14)
NetR13_1: R13.1 U1.30 | length 1790.2
  Top Layer w6: U1.30 2982.52,3190 2973,3180.48 2973,3129.59 2989.55,3113.03 3034.97,3113.03 3067,3081 3067,3030 v1(3003,2966) ; R13.1 4217.5,2989.57 4215,2992.07 4215,3040 4228,3053 v1(4271,3053)
  Bottom Layer w6: v1(3003,2966) 4184,2966 v1(4271,3053)
NetR14_1: R14.1 U1.31 | length 1818.8
  Top Layer w6: v1(3002.2,3154.8) U1.31 ; v1(4187,2773) 4230,2773 R14.1
  Bottom Layer w6: v1(3002.2,3154.8) 3050,3107 4281,3107 4305,3083 4305,2891 v1(4187,2773)
NetR15_1: R15.1 U1.32 | length 2991.9
  Top Layer w6: R15.1 2002.5,1275 2000,1277.5 2000,2947 v1(2243,3190) ; U1.32 3021.89,3192 3036,3177.89 3036,3156 3050,3142 v1(3063,3142)
  Bottom Layer w6: v1(2243,3190) 3031,3190 3063,3158 v1(3063,3142)
NetR16_1: R16.1 U1.34 | length 3497.9
  Top Layer w6: v1(1993,3072) 1993,1110 2005.72,1097.28 R16.1 ; U1.34 3061.26,3384.26 v1(3071,3394)
  Bottom Layer w6: v1(1993,3072) 2315,3394 v1(3071,3394)
NetU1_87: U1.87 Y1.3 | length 288
  Top Layer w6: Y1.3 3150,4068 3128,4046 3128,3940 3159.69,3908.31 U1.87
pads on no net: DS4.4 DS4.5 DS4.6 DS4.7 DS4.8 DS4.9 DS4.10 DS4.11 DS4.12 DS4.13 U1.1 U1.2 U1.3 U1.4 U1.7 U1.8 U1.9 U1.10 U1.12 U1.13 U1.14 U1.15 U1.16 U1.17 U1.18 U1.19 U1.20 U1.21 U1.24 U1.25 U1.35 U1.36 U1.37 U1.38 U1.39 U1.40 U1.41 U1.42 U1.43 U1.45 U1.47 U1.48 U1.49 U1.51 U1.52 U1.53 U1.54 U1.57 U1.58 U1.59 U1.60 U1.61 U1.62 U1.63 U1.64 U1.65 U1.66 U1.67 U1.68 U1.69 U1.70 U1.71 U1.74 U1.75 U1.76 U1.77 U1.82 U1.86 U1.95